# Altium PCB Art_Imp.PcbDoc
Units mm, origin at the board's own origin, x right, y up, seen from the top; angles counter-clockwise.
Board outline 92 x 38 mm, 2 copper layers (Top Layer, Bottom Layer); 38 components, 21 nets, 110 pads, 43 vias.
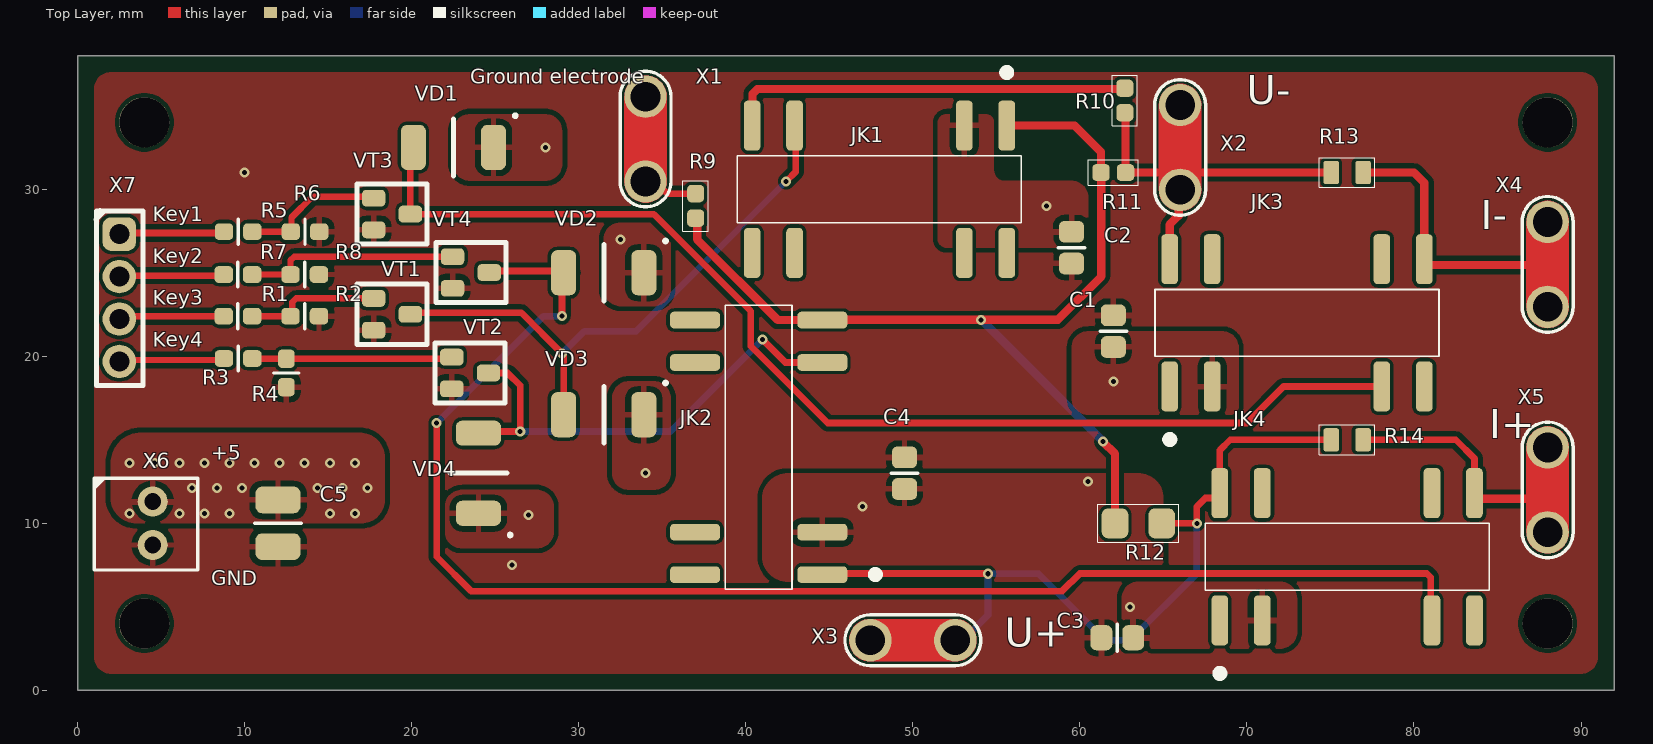
[diagram p0: Top Layer view]
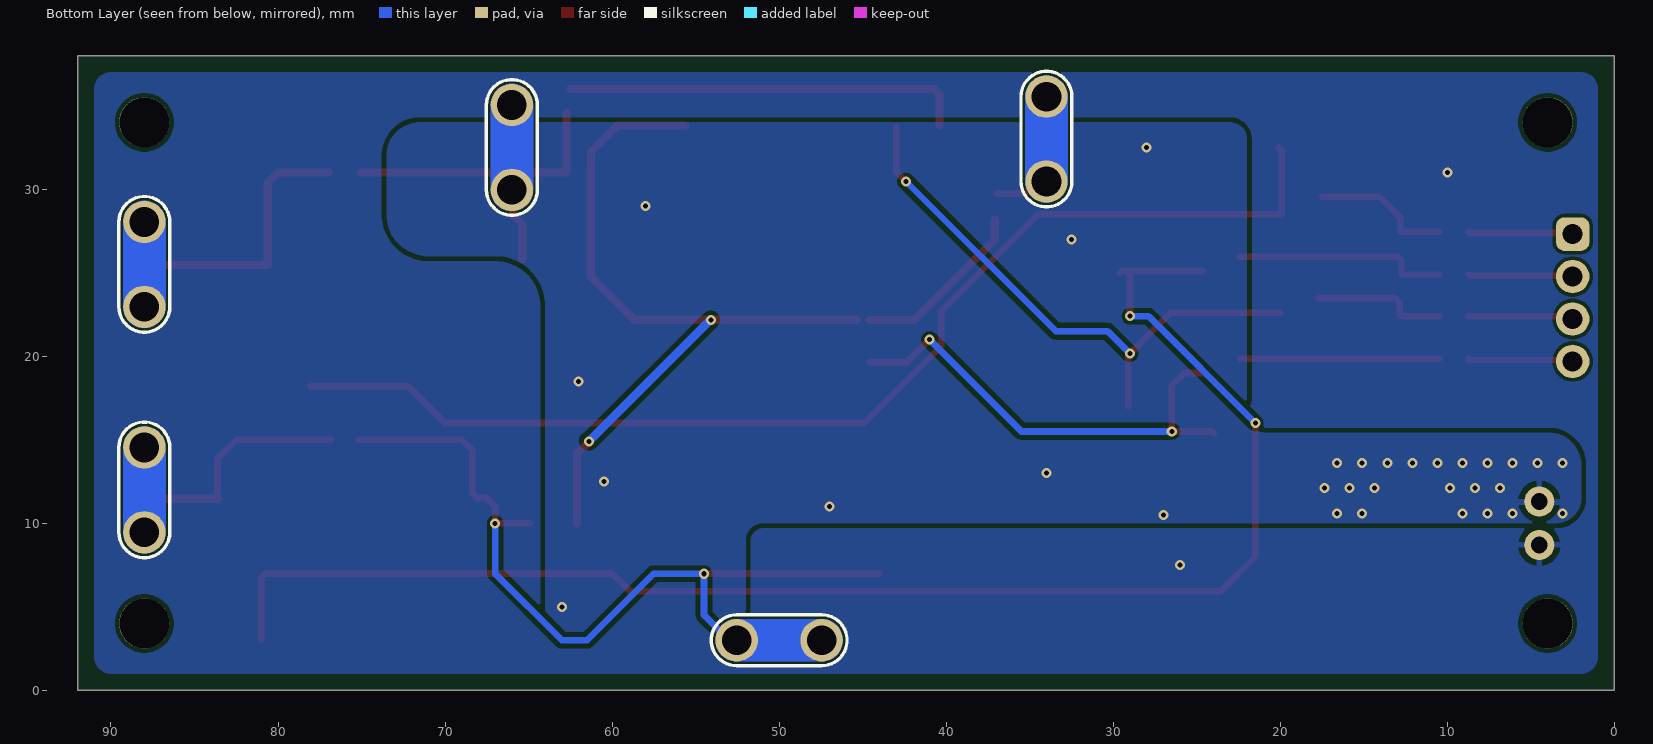
[diagram p1: Bottom Layer view, seen from below]

## Layer stack, top to bottom
Top Solder: solder mask 0.0102, Solder Resist, Dk 3.5
Top Layer: signal copper 0.0356
Dielectric 1: dielectric 0.32, FR-4, Dk 4.8
Bottom Layer: signal copper 0.0356
Bottom Solder: solder mask 0.0102, Solder Resist, Dk 3.5

## Board outline
0,0 92,0 92,38 0,38

## Design rules (kind name [scope] priority, off if disabled: settings)
AcuteAngle [All] p1: minimum=3.50000000000000E+0001 checktracksonly=FALSE
BoardOutlineClearance "BoardOutlineClearance 1" [All] p1: gap=0.25 ignorepadtopadclearanceinfootprint=FALSE except(0: Arc-SplitContinuation Track-SplitContinuation SMDPad-SplitContinuation THPad-SplitContinuation Via-SplitContinuation Fill-SplitContinuation Poly-SplitContinuation Region-SplitContinuation Text-SplitContinuation) // Milling
BoardOutlineClearance "BoardOutlineClearance 2" [All] p2: gap=0.4 ignorepadtopadclearanceinfootprint=FALSE except(0: Arc-SplitContinuation Track-SplitContinuation SMDPad-SplitContinuation THPad-SplitContinuation Via-SplitContinuation Fill-SplitContinuation Poly-SplitContinuation Region-SplitContinuation Text-SplitContinuation) // V-Cut
Clearance "Clearance 3 Oz" [InNet('No Net') vs InNet('No Net')] p1 off: gap=0.35 ignorepadtopadclearanceinfootprint=FALSE except(0.25: Arc-Hole Track-Hole SMDPad-Hole THPad-Hole Via-Hole Fill-Hole Poly-Hole Region-Hole Text-Hole)
Clearance "Clearance 2 Oz" [InNet('No Net') vs InNet('No Net')] p2 off: gap=0.3 ignorepadtopadclearanceinfootprint=FALSE except(0.25: Arc-Hole Track-Hole SMDPad-Hole THPad-Hole Via-Hole Fill-Hole Poly-Hole Region-Hole Text-Hole)
Clearance "Clearance-1 1 Oz" [All] p3: gap=0.2 ignorepadtopadclearanceinfootprint=FALSE except(0.25: Arc-Hole Track-Hole SMDPad-Hole THPad-Hole Via-Hole Fill-Hole Poly-Hole Region-Hole Text-Hole; 0.3: Arc-Fill Arc-Poly Arc-Region Track-Fill Track-Poly Track-Region Fill-Fill Fill-Poly Fill-Region Poly-Poly Poly-Region Region-Region) // Standart
Clearance "Clearance-2 1 Oz" [InNet('No Net') vs InNet('No Net')] p4: gap=0.15 ignorepadtopadclearanceinfootprint=FALSE except(0.2: Arc-Fill Arc-Poly Track-Fill Track-Poly SMDPad-Fill SMDPad-Poly THPad-Fill THPad-Poly Via-Fill Via-Poly Fill-Fill Fill-Poly Poly-Poly; 0.25: Arc-Hole Track-Hole SMDPad-Hole THPad-Hole Via-Hole Fill-Hole Poly-Hole Region-Hole Text-Hole) // Advance
Clearance "Clearance-1 1/2 Oz" [InNet('No Net') vs InNet('No Net')] p5: gap=0.125 ignorepadtopadclearanceinfootprint=FALSE except(0.2: Arc-Fill Arc-Poly Track-Fill Track-Poly SMDPad-SMDPad SMDPad-Fill SMDPad-Poly THPad-Fill THPad-Poly Via-Fill Via-Poly Fill-Fill Fill-Poly Poly-Poly Poly-Region Poly-Text; 0.25: Arc-Hole Track-Hole SMDPad-Hole THPad-Hole Via-Hole Fill-Hole Poly-Hole Region-Hole Text-Hole) // Standart
Clearance "Clearance-2 1/2 Oz" [InNet('No Net') vs InNet('No Net')] p6: gap=0.1 ignorepadtopadclearanceinfootprint=FALSE except(0.15: Arc-Fill Arc-Poly Track-Fill Track-Poly SMDPad-SMDPad SMDPad-Fill SMDPad-Poly THPad-Fill THPad-Poly Via-Fill Via-Poly Fill-Fill Fill-Poly Poly-Poly Poly-Region Poly-Text; 0.25: Arc-Hole Track-Hole SMDPad-Hole THPad-Hole Via-Hole Fill-Hole Poly-Hole Region-Hole Text-Hole) // Advance
DiffPairsRouting "DiffPairsRouting 1 Oz" [All] p1: maxlimit=0.254 minlimit=0.2 mostfreqgap=0.254 toplayer_minwidth=0.2 toplayer_maxwidth=0.381 toplayer_prefwidth=0.381 bottomlayer_minwidth=0.2 bottomlayer_maxwidth=0.381 bottomlayer_prefwidth=0.381 maxuncoupledlength=12.7
DiffPairsRouting "DiffPairsRouting 1/2 Oz" [All] p2: maxlimit=0.254 minlimit=0.1 mostfreqgap=0.254 toplayer_minwidth=0.1 toplayer_maxwidth=0.381 toplayer_prefwidth=0.381 bottomlayer_minwidth=0.1 bottomlayer_maxwidth=0.381 bottomlayer_prefwidth=0.381 maxuncoupledlength=12.7
HoleSize "Minimum HoleSize" [IsPad] p1: absolutevalues=TRUE maxlimit=5.9 minlimit=0.6 maxpercent=80.000 minpercent=20.000
HoleSize "Minimum HoleSize VIA 1" [IsVia] p2: absolutevalues=TRUE maxlimit=5.9 minlimit=0.3 maxpercent=80.000 minpercent=20.000 // Standart
HoleSize "Minimum HoleSize VIA 2" [IsVia] p3: absolutevalues=TRUE maxlimit=5.9 minlimit=0.2 maxpercent=80.000 minpercent=20.000 // Advance
HoleToHoleClearance Hole2HoleClearance [All] p1: gap=0.25 allowstackedmicrovias=FALSE
MinimumAnnularRing "Minimum AR VIA Standart" [IsVia] p1: minimumring=0.15
MinimumAnnularRing "Minimum AR PAD Standart" [IsPAD] p2: minimumring=0.2
MinimumAnnularRing "Minimum AR VIA Advance" [IsVia] p3: minimumring=0.1
MinimumAnnularRing "Minimum AR PAD Advance" [IsPAD] p4: minimumring=0.15
MinimumSolderMaskSliver "SolderMask Bridge Standart" [All] p1: minsoldermaskwidth=0.1 // All Masks
MinimumSolderMaskSliver "SolderMask Bridge Advance" [All] p2: minsoldermaskwidth=0.1 // Mask LDI
PlaneClearance "PlaneClearance 3 Oz" [InNet('No Net')] p1: clearance=0.35
PlaneClearance "PlaneClearance 2 Oz" [InNet('No Net')] p2: clearance=0.3
PlaneClearance "PlaneClearance 1 Oz" [All] p3: clearance=0.2
PlaneClearance "PlaneClearance-1 1/2 Oz" [InNet('No Net')] p4: clearance=0.2 // Standart
PlaneClearance "PlaneClearance-2 1/2 Oz" [InNet('No Net')] p5: clearance=0.15 // Advance
PlaneConnect "TermalConnect 3 Oz" [All] p1: planeconnectstyle=Relief reliefexpansion=0.2 reliefentries=4 reliefconductorwidth=0.35 reliefairgap=0.35 // Standart
PlaneConnect "TermalConnect 2 Oz" [All] p2: planeconnectstyle=Relief reliefexpansion=0.2 reliefentries=4 reliefconductorwidth=0.3 reliefairgap=0.3 // Standart
PlaneConnect "TermalConnect-1 1 Oz" [All] p3: planeconnectstyle=Relief reliefexpansion=0.2 reliefentries=4 reliefconductorwidth=0.2 reliefairgap=0.2 // Standart
PlaneConnect "TermalConnect-2 1 Oz" [All] p4: pad.planeconnectstyle=Relief pad.reliefexpansion=0.15 pad.reliefentries=4 pad.reliefconductorwidth=0.2 pad.reliefairgap=0.2 via.planeconnectstyle=Direct via.reliefexpansion=0.15 via.reliefentries=4 via.reliefconductorwidth=0.15 via.reliefairgap=0.15 // Advance
PlaneConnect "TermalConnect-1 1/2 Oz" [All] p5: planeconnectstyle=Relief reliefexpansion=0.2 reliefentries=4 reliefconductorwidth=0.2 reliefairgap=0.2 // Standart
PlaneConnect "TermalConnect-2 1/2 Oz" [All] p6: pad.planeconnectstyle=Relief pad.reliefexpansion=0.15 pad.reliefentries=4 pad.reliefconductorwidth=0.15 pad.reliefairgap=0.15 via.planeconnectstyle=Direct via.reliefexpansion=0.15 via.reliefentries=4 via.reliefconductorwidth=0.15 via.reliefairgap=0.15 // Advance
PolygonConnect "PolygonConnect 3 Oz" [All] p1: thpad.connectstyle=Relief thpad.reliefconductorwidth=0.35 thpad.reliefentries=4 thpad.polygonreliefangle="90 Angle" thpad.airgapwidth=0.35 smdpad.connectstyle=Relief smdpad.reliefconductorwidth=0.35 smdpad.reliefentries=4 smdpad.polygonreliefangle="90 Angle" smdpad.airgapwidth=0.35 via.connectstyle=Direct via.reliefconductorwidth=0.254 via.reliefentries=4 via.polygonreliefangle="90 Angle" via.airgapwidth=0.254
PolygonConnect "PolygonConnect 2 Oz" [InNet('No Net') vs InNet('No Net')] p2: thpad.connectstyle=Relief thpad.reliefconductorwidth=0.3 thpad.reliefentries=4 thpad.polygonreliefangle="90 Angle" thpad.airgapwidth=0.3 smdpad.connectstyle=Relief smdpad.reliefconductorwidth=0.3 smdpad.reliefentries=4 smdpad.polygonreliefangle="90 Angle" smdpad.airgapwidth=0.3 via.connectstyle=Direct via.reliefconductorwidth=0.254 via.reliefentries=4 via.polygonreliefangle="90 Angle" via.airgapwidth=0.254
PolygonConnect "PolygonConnect-1 1 Oz" [InNet('No Net') vs InNet('No Net')] p3: thpad.connectstyle=Relief thpad.reliefconductorwidth=0.2 thpad.reliefentries=4 thpad.polygonreliefangle="90 Angle" thpad.airgapwidth=0.2 smdpad.connectstyle=Relief smdpad.reliefconductorwidth=0.2 smdpad.reliefentries=4 smdpad.polygonreliefangle="90 Angle" smdpad.airgapwidth=0.2 via.connectstyle=Direct via.reliefconductorwidth=0.254 via.reliefentries=4 via.polygonreliefangle="90 Angle" via.airgapwidth=0.254 // Standart
PolygonConnect "PolygonConnect-2 1 Oz" [InNet('No Net') vs InNet('No Net')] p4: thpad.connectstyle=Relief thpad.reliefconductorwidth=0.15 thpad.reliefentries=4 thpad.polygonreliefangle="90 Angle" thpad.airgapwidth=0.15 smdpad.connectstyle=Relief smdpad.reliefconductorwidth=0.15 smdpad.reliefentries=4 smdpad.polygonreliefangle="90 Angle" smdpad.airgapwidth=0.15 via.connectstyle=Direct via.reliefconductorwidth=0.254 via.reliefentries=4 via.polygonreliefangle="90 Angle" via.airgapwidth=0.254 // Advance
PolygonConnect "PolygonConnect-1 1/2 Oz" [InNet('No Net') vs InNet('No Net')] p5: thpad.connectstyle=Relief thpad.reliefconductorwidth=0.15 thpad.reliefentries=4 thpad.polygonreliefangle="90 Angle" thpad.airgapwidth=0.2 smdpad.connectstyle=Relief smdpad.reliefconductorwidth=0.2 smdpad.reliefentries=4 smdpad.polygonreliefangle="90 Angle" smdpad.airgapwidth=0.2 via.connectstyle=Direct via.reliefconductorwidth=0.254 via.reliefentries=4 via.polygonreliefangle="90 Angle" via.airgapwidth=0.254 // Standart
PolygonConnect "PolygonConnect-2 1/2 Oz" [InNet('No Net') vs InNet('No Net')] p6: thpad.connectstyle=Relief thpad.reliefconductorwidth=0.125 thpad.reliefentries=4 thpad.polygonreliefangle="90 Angle" thpad.airgapwidth=0.15 smdpad.connectstyle=Relief smdpad.reliefconductorwidth=0.125 smdpad.reliefentries=4 smdpad.polygonreliefangle="90 Angle" smdpad.airgapwidth=0.15 via.connectstyle=Direct via.reliefconductorwidth=0.254 via.reliefentries=4 via.polygonreliefangle="90 Angle" via.airgapwidth=0.254 // Advance
RoutingCorners [All] p1 off: cornerstyle=45-Degree minsetback=2.54 maxsetback=2.54
RoutingVias [All] p1: holewidth=0.3 width=0.6 viastyle="Through Hole" minholewidth=0.2 minwidth=0.4 maxholewidth=5.9 maxwidth=6.4
SilkToSilkClearance Silk2SilkClearance [All] p1 off: silktosilkclearance=0.15
SilkToSolderMaskClearance Silk2SolderMaskClearance [IsPad] p1 off: minsilkscreentomaskgap=0.15 clearancetoexposedcopper=TRUE
SolderMaskExpansion SolderMaskExpansion-1 [All] p1: expansion=0.05 istentingtop=FALSE // Standart
SolderMaskExpansion "SolderMaskExpansion LDI" [All] p2: expansion=0.025 istentingtop=FALSE // Advance
UnRoutedNet [All] p1: checkbadconnections=TRUE
Width "Width 3 Oz" [All] p1 off: maxlimit=10 minlimit=0.3 preferedwidth=0.4 minimp=50.000000 maximp=50.000000 favimp=50.000000 checkconnectedcopper=TRUE
Width "Width 2 Oz" [All] p2 off: maxlimit=10 minlimit=0.3 preferedwidth=0.35 minimp=50.000000 maximp=50.000000 favimp=50.000000 checkconnectedcopper=TRUE
Width "Width 1 Oz" [All] p3: maxlimit=10 minlimit=0.15 preferedwidth=0.2 checkconnectedcopper=TRUE
Width "Width 1/2 Oz" [All] p4: maxlimit=10 minlimit=0.1 preferedwidth=0.125 checkconnectedcopper=TRUE
20 further rules are at their usual default settings.

## Classes and differential pairs
component class Art_Imp: C1 C2 C3 C4 C5 JK1 JK2 JK3 JK4 R1 R2 R3 R4 R5 R6 R7 R8 R9 R11 R12 R13 R14 VD1 VD2 VD3 VT1 VT2 VT3 VT4 X1 X2 X3 X4 X5 X6 X7

## Components (designator, comment, footprint, x,y, rotation, side; value= is the part's Value field where it differs from the comment)
C1 "0.1u 50V 0805 ±10%" "CAP: SMD 0805 MD IPC 782" 62,21.5 r90 top
C2 "0.1u 50V 0805 ±10%" "CAP: SMD 0805 MD IPC 782" 59.5,26.5 r90 top
C3 "0.1u 50V 0805 ±10%" "CAP: SMD 0805 MD IPC 782" 62.238,3.149 r0 top
C4 "0.1u 50V 0805 ±10%" "CAP: SMD 0805 MD IPC 782" 49.5,13 r270 top
C5 "47u 16V 1210 ±20%" "CAP: SMD 1210 MD IPC 782" 12,10 r270 top
JK1 "TRR-1A-05-S-00R" TTR 48,30 r180 top
JK2 "TRR-1A-05-S-00R" TTR 40.772,14.55 r90 top
JK3 "TRR-1A-05-S-00R" TTR 73,22 r0 top
JK4 "TRR-1A-05-S-00R" TTR 76,8 r0 top
R1 "10k ±1% 0603" "RES: SMD 0603 MD IPC 782" 9.6,22.399 r180 top
R2 "10k ±1% 0603" "RES: SMD 0603 MD IPC 782" 13.6,22.399 r180 top
R3 "10k ±1% 0603" "RES: SMD 0603 MD IPC 782" 9.617,19.867 r180 top
R4 "10k ±1% 0603" "RES: SMD 0603 MD IPC 782" 12.5,19 r90 top
R5 "10k ±1% 0603" "RES: SMD 0603 MD IPC 782" 9.617,27.455 r180 top
R6 "10k ±1% 0603" "RES: SMD 0603 MD IPC 782" 13.617,27.455 r180 top
R7 "10k ±1% 0603" "RES: SMD 0603 MD IPC 782" 9.6,24.89 r180 top
R8 "10k ±1% 0603" "RES: SMD 0603 MD IPC 782" 13.6,24.89 r180 top
R9 "130R" 0603 37,29 r270 top
R10 "130R" 0603 62.687,35.31 r270 top
R11 "68R" 0603 62,31 r0 top
R12 "0R01" 1206 63.5,10 r180 top
R13 "2.4k" 0805 76,31 r0 top
R14 "2.4k" 0805 76,15 r0 top
VD1 "SM4002-W 1A 100V" "DIODE: MELF" 22.5,32.5 r0 top
VD2 "SM4002-W 1A 100V" "DIODE: MELF" 31.5,25 r0 top
VD3 "SM4002-W 1A 100V" "DIODE: MELF" 31.5,16.5 r0 top
VD4 "SM4002-W 1A 100V" "DIODE: MELF" 24,13 r270 top
VT1 "BC850C" "IC: SOT 23" 18.825,22.512 r0 top
VT2 "BC850C" "IC: SOT 23" 23.5,19 r0 top
VT3 "BC850C" "IC: SOT 23" 18.825,28.512 r0 top
VT4 "BC850C" "IC: SOT 23" 23.55,25.012 r0 top
X1 "DJ4.8" DJ4.8 34,33 r270 top
X2 "DJ4.8" DJ4.8 66,32.5 r270 top
X3 "DJ4.8" DJ4.8 50,3 r180 top
X4 "DJ4.8" DJ4.8 88,25.5 r270 top
X5 "DJ4.8" DJ4.8 88,12 r270 top
X6 "WF-2" "CON: 2pin wf-2" 4,10 r270 top
X7 "PLS-4" "CON: 4pin PLS-4" 2.5,23.5 r270 top

## Footprints (in the part's own frame and the unit in brackets; to place one, negate y for a bottom-side part, rotate by r counter-clockwise, add the part's x,y. Pads: shape width x height; smd on the part's side, far side on the other; paste and mask are expansions set on the pad)
0603 [mm]
  rrect50% 1.04x1.02 smd: 1(-0.735,0) 2(0.735,0)
  silkscreen extent -1.51,-0.76 1.51,0.76, body extent -0.8,-0.45 0.8,0.45, height 0.5
0805 [mm]
  rrect25% 0.92x1.38 smd: 1(-0.955,0) 2(0.955,0)
  silkscreen extent -1.67,-0.89 1.66,0.89, body extent -1,-0.63 1,0.63, height 0.5
1206 [mm]
  rrect50% 1.6x1.8 smd: 1(-1.4,0) 2(1.4,0)
  silkscreen extent -2.42,-1.13 2.42,1.13, body extent -1.6,-0.8 1.6,0.8, height 0.6
"CAP: SMD 0805 MD IPC 782" [mm]
  rrect50% 1.3x1.5 smd: 1(-0.95,0) 2(0.95,0)
  silkscreen extent 0,-0.8 0,0.8, body extent -1.4,-0.63 1.4,0.63, height 0.8
"CAP: SMD 1210 MD IPC 782" [mm]
  rrect50% 1.6x2.7 smd: 1(-1.4,0) 2(1.4,0)
  silkscreen extent 0,-1.4 0,1.4, body extent -2.47,-1.25 2.47,1.25, height 1.61
"CON: 2pin wf-2" [mm]
  round 1.8 hole 1: 1(-1.3,0.5) 2(1.3,0.5)
  silkscreen extent -2.7,-3 2.8,3.2, body extent -2.49,-2.8 2.59,3, height 11.56
"CON: 4pin PLS-4" [mm]
  rrect50% 2x2 hole 1.2: 1(-3.81,0)
  round 2 hole 1.2: 2(-1.27,0) 3(1.27,0) 4(3.81,0)
  silkscreen extent -5.21,-1.39 5.25,1.42, body extent -5.08,-1.3 5.08,1.3, height 7.83
"DIODE: MELF" [mm]
  rrect50% 1.5x2.7 smd: 1(2.4,0) 2(-2.4,0)
  silkscreen extent 0,-1.7 3.8,2, body extent -2.49,-1.24 2.51,1.24, height 2.5
DJ4.8 [mil]
  round 100 hole 70 mask+2: 1(-100,0) 1(100,0)
  Top Layer region: -150,0 -143.3,25 -125,43.3 -100,50 -100,50 100,50 119.13,46.2 135.36,35.36 146.2,19.13 150,0 150,0 146.2,-19.14 135.36,-35.36 119.13,-46.2 100,-50 100,-50 -100,-50 -119.13,-46.19 -135.36,-35.36 -146.19,-19.13 -150,0
  Bottom Layer region: -150,0 -143.3,25 -125,43.3 -100,50 -100,50 100,50 119.13,46.2 135.36,35.36 146.2,19.13 150,0 150,0 146.2,-19.14 135.36,-35.36 119.13,-46.2 100,-50 100,-50 -100,-50 -119.13,-46.19 -135.36,-35.36 -146.19,-19.13 -150,0
  silkscreen extent -160,-60 160,60, body extent -140,-16 140,16, height 362
"IC: SOT 23" [mm]
  rrect50% 1.4x1 smd: 1(-1.1,0.95) 2(-1.1,-0.95) 3(1.1,0)
  silkscreen extent -2.1,-1.8 2.1,1.8, body extent -1.32,-1.5 1.32,1.5, height 1.08
"RES: SMD 0603 MD IPC 782" [mm]
  rrect50% 1.1x1 smd: 1(-0.85,0) 2(0.85,0)
  silkscreen extent 0,-0.75 0,0.75, body extent -1.23,-0.4 1.23,0.4, height 0.8
TTR [mm]
  rrect50% 1x3 smd: 1(-7.623,-3.81) 2(-5.083,-3.81) 6(5.077,-3.81) 7(7.617,-3.81) 8(7.617,3.81) 9(5.077,3.81) 13(-5.083,3.81) 14(-7.623,3.81)
  silkscreen extent -8.5,-7.18 8.5,2, body extent -9.83,-4.78 9.67,4.84, height 5.5

## Part data
JK1 JK2 JK3 JK4: library part "Реле герконовые TRR-1A-05-S-00R", "Реле герконовые TRR-1A-05-S-00R", ComponentLink1Description=Chipdip, ComponentLink1URL=https://www.chipdip.ru/product/trr-1a-05-s-00r-tai-shing-tti-8001786496, P/N="Реле герконовые TRR-1A-05-S-00R, Tai Shing"
R9 R10: library part "130 0,05% 0603", "0603", ComponentLink1Description=Chipdip, ComponentLink1URL=https://www.chipdip.ru/product/rg1608n-131-w-t1-susumu-8001999350, P/N="Резистор RG1608N-131-W-T1, Susumu"
R11: library part "68 0,05% 0603", "0603", ComponentLink1Description=Chipdip, ComponentLink1URL=https://www.chipdip.ru/product/rg1608n-131-w-t1-susumu-8001999350, P/N="Резистор RG1608N-680-W-T1, Susumu"
R12: library part "0.01 0,05% 1206", "1206", ComponentLink1Description=Chipdip, ComponentLink1URL=https://www.chipdip.ru/product/rg1608n-131-w-t1-susumu-8001999350, P/N="Резистор CRF1206-FZ-R010ELF, Bourns"
R13 R14: library part "2.4k 0,05% 0805", "0805", ComponentLink1Description=Chipdip, ComponentLink1URL=https://www.chipdip.ru/product/rg2012n-242-w-t1-susumu-8001999371, P/N="Резистор RG2012N-242-W-T1 Susumu"
VD1 VD2 VD3 VD4: library part "Rectifier 1A 100V", Code=6341199702, Name="Диод SM4002-W, RECTRON"
VT1 VT2 VT3 VT4: library part "BJT NPN BC850C", Code=6340001151, Name="Транзистор BC850C,215, Nexperia"
X1 X2 X3 X4 X5: library part "1 pin DJ4.8", "Клемма ножевая 4.8 мм"
X6: library part "2 pin WF-2", Code=6313952902, Name="Вилка WF-2"
X7: library part "4 pin PLS-4", Code=6313932041, Name="Вилка WF-4"
C1 C2 C3 C4: Code=6279254871, Name="Конденсатор X7R 50V 0,1uF ±10% 0805"
C5: Code=6289734921, Name="Конденсатор GRM32ER61C476ME15L"
R1 R2 R3 R4 R5 R6 R7 R8: Code=6069191961, Name="Резистор 10K+-1% TK50 0603"

## Free pads (board coordinates)
  round 3 hole 3 unplated: ""(4,4) ""(4,34) ""(88,4) ""(88,34)

## Via types
v1: diameter 0.6/0.6 (per signal layer), hole 0.3, Top Layer to Bottom Layer, 22 vias
v2: diameter 0.6, hole 0.3, Top Layer to Bottom Layer, 21 vias

## Nets (pads, with @x,y where several pads share a name; then routed paths per layer and width w, separated by ;. In a path a pad name is that pad's centre, name@x,y a point inside that pad or via, vN(x,y) a via of type N, cw(c..) or ccw(c..) an arc to the next point about the centre after c; other vN are vias at no path point)
+5: C1.1 C2.2 C3.2 C4.2 C5.1 JK1.2 JK2.2 JK3.2 JK4.2 VD1.1 VD2.1 VD3.1 VD4.1 X6.1
  other v1: 3.1,10.6 6.1,10.6 7.6,10.6 9.1,10.6 15.1,10.6 16.6,10.6 6.85,12.1 8.35,12.1 9.85,12.1 14.35,12.1 15.85,12.1 17.35,12.1 3.1,13.6 4.6,13.6 6.1,13.6 7.6,13.6 9.1,13.6 10.6,13.6 12.1,13.6 13.6,13.6 15.1,13.6 16.6,13.6
  other v2: 63,5 27,10.5 47,11 60.5,12.5 34,13 62,18.5 32.5,27 58,29 28,32.5
GNDA: C1.2 C2.1 C3.1 C4.1 C5.2 R2.1 R4.1 R6.1 R8.1 VT1.2 VT2.2 VT3.2 VT4.2 X6.2
  other v2: 26,7.5 10,31
Key1: R5.2 X7.1 | length 6.3
  Top Layer w0.4: X7.1@2.5,27.378 8.689,27.378 R5.2
Key2: R7.2 X7.2 | length 6.3
  Top Layer w0.381: X7.2@2.5,24.825 8.685,24.825 R7.2
Key3: R1.2 X7.3 | length 6.3
  Top Layer w0.381: X7.3@2.5,22.399 R1.2
Key4: R3.2 X7.4 | length 6.3
  Top Layer w0.381: X7.4@2.5,19.773 8.673,19.773 R3.2
NetJK1_1: JK1.1 JK2.7 R9.2 R11.1 R12.2 | length 56.9
  Top Layer w0.5: R9.2@37.088,28.177 37.088,26.995 41.916,22.167 JK2.7 ; JK2.7@45.363,22.186 45.373,22.175 54.085,22.175 v2(54.093,22.183) ; v2@54.102,22.191 58.691,22.191 61.282,24.782 R11.1@61.282,30.983 ; JK1.1 59.69,33.81 61.265,32.235 R11.1 ; v2(61.397,14.897) 61.397,14.869 62.1,14.166 R12.2
  Bottom Layer w0.5: v2(54.093,22.183) 54.102,22.183 61.369,14.916 61.377,14.916 61.391,14.929 v2@61.429,14.929
NetJK1_6: JK1.6 VD3.2 VT1.3 | length 34.4
  Top Layer w0.4: VT1.3@20,22.6 26.567,22.6 v2(29.01,20.157) ; v2@29.01,20.103 29.1,20.013 VD3.2@29.1,17 ; v2(42.42,30.474) 43,31.054 JK1.6@43,33.749
  Bottom Layer w0.4: v2(29.01,20.157) 30.353,21.5 33.446,21.5 v2(42.42,30.474)
NetJK1_7: JK1.7 R10.1 | length 24.1
  Top Layer w0.5: JK1.7@40.397,33.827 40.4,33.83 40.4,35.707 40.693,36 R10.1@62.511,36
NetJK2_1: JK2.1 JK4.14 R12.1 R14.1 X3.1 | length 48.4
  Top Layer w0.4: JK2.1@43.991,6.991 54.489,6.991 v2(54.5,6.98) ; R12.1 v2(67,10) 67,11 67.511,11.511 68.081,11.511 68.377,11.808 JK4.14 ; JK4.14@68.38,11.81 68.38,14.38 69,15 R14.1@75.181,15
  Bottom Layer w0.4: X3.1@53,3 54.5,4.5 v2(54.5,6.98) 57.52,6.98 61.5,3 63,3 67,7 v2(67,10)
NetJK2_6: JK2.6 VD4.2 VT2.3 | length 28.4
  Top Layer w0.4: VD4.2 24.1,15.5 v2(26.5,15.5) 26.5,18.247 25.747,19 VT2.3 ; v2(41,21) 42.373,19.627 JK2.6
  Bottom Layer w0.4: v2(26.5,15.5) 35.5,15.5 v2(41,21)
NetJK3_6: JK3.6 VD1.2 VT3.3 | length 69.5
  Top Layer w0.4: VD1.2 19.925,32.325 VT3.3 19.925,28.5 34.5,28.5 40.3,22.7 40.3,20.605 44.905,16 70,16 72.19,18.19 JK3.6
NetJK3_8: JK3.8 R13.2 X4.1 | length 16.3
  Top Layer w0.5: R13.2 80,31 80.62,30.38 JK3.8@80.62,25.46 ; JK3.8@80.571,25.46 JK3.8@80.62,25.46 ; 88,25.46 JK3.8@80.62,25.46
NetJK3_14: JK3.14 R10.2 R11.2 R13.1 X2.1 | length 22
  Top Layer w0.5: R11.2@62.73,31.019 R10.2@62.73,34.575 ; R11.2 65.915,31 R13.1 ; JK3.14 65.377,27.877 65.915,28.415 X2.1@65.915,30.716 ; X2.1@66,34.04 X2.1@66,35.04
NetJK4_6: JK4.6 VD2.2 VT4.3 | length 90.4
  Top Layer w0.4: v2(21.5,16) 21.5,8 23.563,5.937 58.937,5.937 60,7 80.766,7 81,6.766 JK4.6@81,3.048 ; VT4.3@24.65,25.1 29.1,25.1 29.5,25.1 VD2.2@29.6,25 ; v2(29,22.401) 29,24.9 VD2.2
  Bottom Layer w0.4: v2(21.5,16) 27.901,22.401 v2(29,22.401)
NetJK4_8: JK4.8 R14.2 X5.1 | length 13.7
  Top Layer w0.4: R14.2@76.834,15 82.5,15 83.617,13.883 JK4.8
  Top Layer w0.5: JK4.8@83.6,11.46 88,11.46
NetR1_1: R1.1 R2.2 VT1.1 | length 8.1
  Top Layer w0.381: R1.1 R2.2 12.86,22.509 12.86,23.239 13.083,23.462 VT1.1
NetR3_1: R3.1 R4.2 VT2.1 | length 11.9
  Top Layer w0.381: R3.1 10.472,19.861 VT2.1@22.4,19.861
NetR5_1: R5.1 R6.2 VT3.1 | length 8.4
  Top Layer w0.381: R5.1 R6.2 ; R6.2@12.817,27.455 R6.2 ; VT3.1@17.5,29.55 14.05,29.55 12.804,28.304 12.804,27.492 R6.2
NetR7_1: R7.1 R8.2 VT4.1 | length 12.9
  Top Layer w0.381: R7.1 R8.2 12.75,25.739 12.973,25.962 VT4.1
NetR9_1: R9.1 X1.1 | length 3.3
  Top Layer w0.4: X1.1@34,30.46 34.568,30.46 35.304,29.723 R9.1@36.988,29.723
pads on no net: JK1.8 JK1.9 JK1.13 JK1.14 JK2.8 JK2.9 JK2.13 JK2.14 JK3.1 JK3.7 JK3.9 JK3.13 JK4.1 JK4.7 JK4.9 JK4.13

## Polygon pours and split planes (outlines as drawn)
+5 on Top Layer "NONET_L-01_P-001" (solid, remove dead copper, pour order 8): 23.5,34.5 28,34.5 cw(c28,33.5) 29,33.5 29,31.5 cw(c28,31.5) 28,30.5 23.5,30.5 cw(c23.5,31.5) 22.5,31.5 22.5,33.5 cw(c23.5,33.5)
+5 on Top Layer "NONET_L-01_P-001" (solid, remove dead copper, pour order 9): 32.5,28 34.5,28 cw(c34.5,27) 35.5,27 35.5,24 cw(c34.5,24) 34.5,23 32.5,23 cw(c32.5,24) 31.5,24 31.5,27 cw(c32.5,27)
+5 on Top Layer "NONET_L-01_P-001" (solid, remove dead copper, pour order 10): 33,12 34.5,12 ccw(c34.5,13) 35.5,13 35.5,17.5 ccw(c34.5,17.5) 34.5,18.5 33,18.5 ccw(c33,17.5) 32,17.5 32,13 ccw(c33,13)
+5 on Top Layer "NONET_L-01_P-001" (solid, remove dead copper, pour order 18): 23,12 27.5,12 cw(c27.5,11) 28.5,11 28.5,9.5 cw(c27.5,9.5) 27.5,8.5 23,8.5 cw(c23,9.5) 22,9.5 22,11 cw(c23,11)
+5 on Top Layer "NONET_L-01_P-001" (solid, remove dead copper, pour order 30): 17,10 3.5,10 cw(c3.5,11.5) 2,11.5 2,13.61 cw(c3.817,13.61) 3.817,15.427 16.882,15.427 cw(c16.882,13.928) 18.382,13.927 18.382,11.382 cw(c17,11.382)
+5 on Top Layer "NONET_L-01_P-001" (solid, remove dead copper, pour order 31): 63.5,6.5 72,6.5 cw(c72,5.5) 73,5.5 73,3.5 cw(c72,3.5) 72,2.5 63.5,2.5 cw(c63.5,3.5) 62.5,3.5 62.5,5.5 cw(c63.5,5.5)
+5 on Top Layer "NONET_L-01_P-001" (solid, remove dead copper, pour order 32): 42.5,6.5 65,6.5 65,11.5 ccw(c63.5,11.5) 63.5,13 42.5,13 ccw(c42.5,11.5) 41,11.5 41,8 ccw(c42.5,8)
+5 on Top Layer "NONET_L-01_P-001" (solid, remove dead copper, pour order 7): 52,34.5 54.349,34.5 cw(c54.349,33.998) 54.851,33.998 54.851,31.149 ccw(c55.5,31.149) 55.5,30.5 59.5,30.5 cw(c59.5,29.5) 60.5,29.5 60.5,27.5 cw(c59.5,27.5) 59.5,26.5 52,26.5 cw(c52,27) 51.5,27 51.5,34 cw(c52,34)
+5 on Top Layer "NONET_L-01_P-001" (solid, remove dead copper, pour order 3): 60.5,21.5 68.5,21.5 cw(c68.5,20.5) 69.5,20.5 69.5,17 cw(c69,17) 69,16.5 60.5,16.5 cw(c60.5,17.5) 59.5,17.5 59.5,20.5 cw(c60.5,20.5)
GNDA on Top Layer "NONET_L-01_P-001" (solid, remove dead copper, pour order 33): 2,1 90,1 ccw(c90,2) 91,2 91,36 ccw(c90,36) 90,37 2,37 ccw(c2,36) 1,36 1,2 ccw(c2,2)
+5 on Bottom Layer "Bottom Layer-+5" (solid, remove dead copper, pour order 15): 3.5,10 51,10 cw(c51,9) 52,9 52,5 ccw(c53.5,5) 53.5,3.5 63,3.5 ccw(c63,4.5) 64,4.5 64,23 cw(c67,23) 67,26 71,26 ccw(c71,28.5) 73.5,28.5 73.5,32 ccw(c71.5,32) 71.5,34 23,34 ccw(c23,33) 22,33 22,16.5 cw(c20.928,16.5) 20.928,15.428 3.928,15.428 ccw(c3.928,13.5) 2,13.5 2,11.5 ccw(c3.5,11.5)
GNDA on Bottom Layer "NONET_L-01_P-001" (solid, remove dead copper, pour order 19): 2,1 90,1 ccw(c90,2) 91,2 91,36 ccw(c90,36) 90,37 2,37 ccw(c2,36) 1,36 1,2 ccw(c2,2)

## Silkscreen, mask and mechanical layers (free items; w line width, h text height)
Top Overlay:
  text "Ground electrode" at 23.5,36 h1.5
  text "U-" at 70,34.5 h3
  text "Key1" at 4.5,27.773 h1.5
  text "I-" at 84,27 h3
  text "Key2" at 4.5,25.273 h1.5
  text "Key3" at 4.5,22.773 h1.5
  text "Key4" at 4.5,20.273 h1.5
  text "I+" at 84.5,14.5 h3
  text "+5" at 8,13.5 h1.5
  text "GND" at 8,6 h1.5
  text "U+" at 55.5,2 h3
Top Solder:
  the board outline again, w0.1
Bottom Solder:
  the board outline again, w0.1